# Altium PCB Probe.PcbDoc
Units mil, origin at the board's own origin, x right, y up, seen from the top; angles counter-clockwise.
Board outline 535.43 x 1175.2 mil, 2 copper layers (Top Layer, Bottom Layer); 4 components, 4 nets, 10 pads, 1 vias.
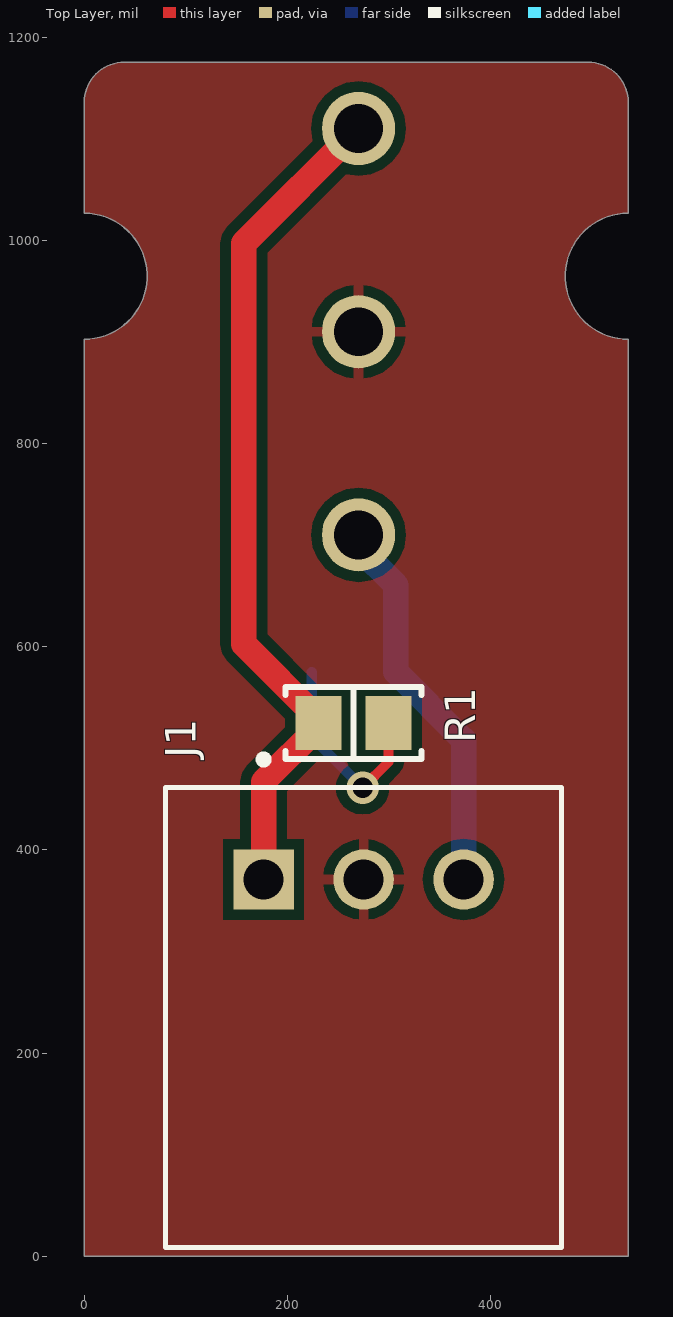
[diagram p0: Top Layer view]
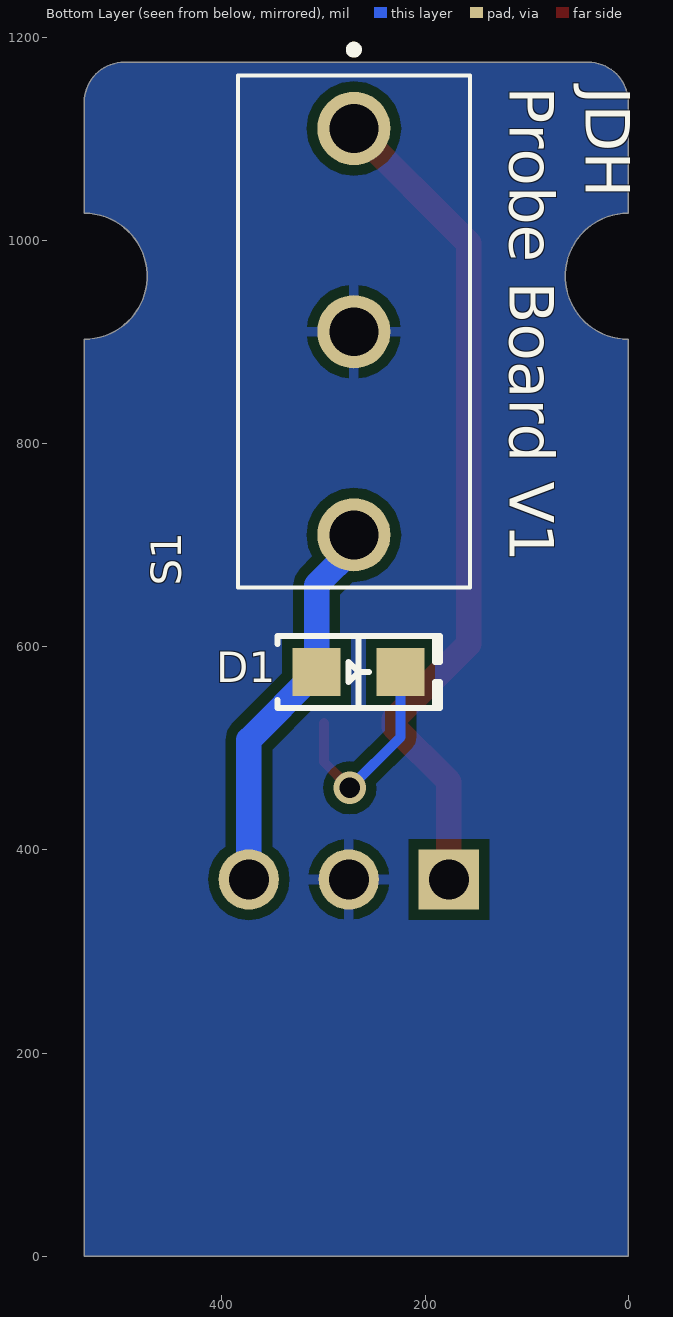
[diagram p1: Bottom Layer view, seen from below]

## Layer stack, top to bottom
Top Solder: solder mask 0.4, Solder Resist, Dk 3.5
Top Layer: signal copper 1.4
Dielectric 1: dielectric 12.6, FR-4, Dk 4.8
Bottom Layer: signal copper 1.4
Bottom Solder: solder mask 0.4, Solder Resist, Dk 3.5

## Board outline
0,0 0,902.56 ccw(c0,964.57) 0,1026.57 0,1135.83 cw(c39.37,1135.83) 39.37,1175.2 496.06,1175.2 cw(c496.06,1135.83) 535.43,1135.83 535.43,1026.57 ccw(c535.43,964.57) 535.43,902.56 535.43,0

## Design rules (kind name [scope] priority, off if disabled: settings)
Clearance [All] p1: gap=10 ignorepadtopadclearanceinfootprint=FALSE except(0: Arc-Hole Track-Hole SMDPad-Hole THPad-Hole Via-Hole Fill-Hole Poly-Hole Region-Hole Text-Hole)
PolygonConnect [All] p1: connectstyle=Relief reliefconductorwidth=10 reliefentries=4 polygonreliefangle="90 Angle" airgapwidth=10
RoomDefinition Probe [InComponentClass('Probe')] p1: confinementstyle=ConfineIn formatcopy=TRUE lockcomponents=FALSE outline 59,-13 491,-13 491,1241 59,1241
RoutingVias [All] p1: holewidth=28 width=50 viastyle="Through Hole" minholewidth=28 minwidth=50 maxholewidth=28 maxwidth=50
SolderMaskExpansion [All] p1: expansion=4 istentingtop=TRUE
Width [All] p1: maxlimit=100 minlimit=10 preferedwidth=10
30 further rules are at their usual default settings.

## Components (designator, comment, footprint, x,y, rotation, side; value= is the part's Value field where it differs from the comment)
D1 "Blue" "LED 0805_2012 BLUE" 265.34,575 r180 bottom
J1 "S3B-XH-A(LF)(SN)" JST_S3B-XH-A(LF)(SN) 275,235 r180 top
R1 "1 kOhms" "RES 0805_2012" 265,525 r0 top
S1 "ZMA00A080P00PC" ZMA00A080P00PC 270,1110 r270 bottom

## Footprints (in the part's own frame and the unit in brackets; to place one, negate y for a bottom-side part, rotate by r counter-clockwise, add the part's x,y. Pads: shape width x height; smd on the part's side, far side on the other; paste and mask are expansions set on the pad)
JST_S3B-XH-A(LF)(SN) [mm]
  rect 1.508x1.508 hole 1: 1(2.5,-3.45)
  round 1.508 hole 1: 2(0,-3.45) 3(-2.5,-3.45)
  silkscreen extent -4.95,-6.55 4.95,5.75, body extent -4.95,-5.75 4.95,5.75, height 6.15
"LED 0805_2012 BLUE" [mm] "Chip Diode, 2-Leads, Body 2.00x1.25mm, IPC Medium Density"
  rect 1.2x1.2 smd: 1(-1.05,0) 2(1.05,0)
  silkscreen extent -2.03,-0.9 2.03,0.9, body extent -1,-0.63 1,0.63, height 0.9
"RES 0805_2012" [mm] "Chip Resistor, 2-Leads, Body 2.00x1.25mm, IPC Medium Density"
  rect 1.15x1.35 smd: 1(-0.875,0) 2(0.875,0)
  silkscreen extent -1.7,-0.9 1.7,0.9, body extent -1,-0.62 1,0.63, height 0.6
ZMA00A080P00PC [mm]
  round 1.83 hole 1.22: 1(0,0) 2(5.08,0) 3(10.16,0)
  silkscreen extent -2.02,-2.9 11.48,2.9, body extent -1.32,-2.9 11.48,2.9, height 7.45

## Part data
D1: library part 5990191007F, "LED BLUE 0805 SMD", Current - Test=20mA, Device Package="0805 (2012 Metric)", Lens Color=0.80mm, Manufacturer=Dialight, Millicandela Rating=105mcd, Supplier Device Package=0805, Supplier Part Number 1=350-4359-1-ND, Voltage - Forward (Vf) (Typ)=3.2V, Color=Blue, ComponentLink1Description=Datasheet, ComponentLink1URL=http://www.dialightsignalsandcomponents.com/Assets/Brochures_And_Catalogs/Indication/CBI_SMD_new/Dialight_CBI_data_599-0805_Apr2018.pdf, ComponentLink2Description="DigiKey Link", ComponentLink2URL=https://www.digikey.com/en/products/detail/dialight/5990191007F/9385414, Configuration=Standard, Height (Max)=0.80mm, LastUpdated="4/12/2022 10:51:43 PM", Lens Size="1.40mm x 1.25mm", Lens Style="Rectangle with Flat Top", Lifecycle Status=Active, Minimum Order=1, Mounting Type="Surface Mount", Package / Case="0805 (2012 Metric)", Packaging=TapeAndReel, Part Number=5990191007F, Part Status=Active, PartId=759, Price=0.09, Series=599, Size / Dimension="2.00mm L x 1.25mm W", Supplier 1=DigiKey, Viewing Angle=140°, Wavelength - Dominant=470nm
J1: "Connector Header Through Hole, Right Angle 3 position 0.098\" (2.50mm)", Package=None, Availability=Unavailable, MF="{'manufacturer': u'JST Sales America Inc.'}", MP=S3B-XH-A(LF)(SN), Price=None
R1: library part RNCP0805FTD1K00, "RES 1K OHM 1% 1/4W 0805", Device Package="0805 (2012 Metric)", Manufacturer="Stackpole Electronics Inc", Operating Temperature="-55°C ~ 155°C", Power (Watts)="0.25W, 1/4W", Supplier Device Package=0805, Supplier Part Number 1=RNCP0805FTD1K00CT-ND, Temperature Coefficient=±100ppm/°C, Tolerance=±1%, ComponentLink1Description=Datasheet, ComponentLink1URL=https://www.seielect.com/catalog/sei-rncp.pdf, ComponentLink2Description="DigiKey Link", ComponentLink2URL=https://www.digikey.com/en/products/detail/stackpole-electronics-inc/RNCP0805FTD1K00/2240229, Composition="Thin Film", Features=Anti-Sulfur, Height - Seated (Max)="0.025\" (0.65mm)", LastUpdated="4/12/2022 10:40:40 PM", Lifecycle Status=Active, Minimum Order=1, Number of Terminations=2, Package / Case="0805 (2012 Metric)", Packaging=TapeAndReel, Part Number=RNCP0805FTD1K00, Part Status=Active, PartId=28023, Price=0.01, Resistance="1 kOhms", Series=RNCP, Size / Dimension="0.079\" L x 0.049\" W (2.00mm x 1.25mm)", Supplier 1=DigiKey
S1: "Switch", Manufacturer_Name="C & K COMPONENTS", Datasheet Link=https://www.ckswitches.com/media/1372/zmasnap.pdf, Height=7.35mm, Manufacturer_Part_Number=ZMA00A080P00PC

## Via types
v1: diameter 32, hole 20, Top Layer to Bottom Layer, tented both sides, 1 vias

## Nets (pads, with @x,y where several pads share a name; then routed paths per layer and width w, separated by ;. In a path a pad name is that pad's centre, name@x,y a point inside that pad or via, vN(x,y) a via of type N, cw(c..) or ccw(c..) an arc to the next point about the centre after c; other vN are vias at no path point)
GND: J1.2 S1.2
NetD1_2: D1.2 R1.2 | length 209.3
  Top Layer w10: v1(274,461) 299.45,486.45 R1.2
  Bottom Layer w10: D1.2 224,511 v1(274,461)
SIG: J1.1 R1.1 S1.1 | length 838.8
  Top Layer w25: J1.1 176.57,467.09 230.55,521.06 R1.1 230.55,528.94 157,602.49 157,997 S1.1
VCC: D1.1 J1.3 S1.3 | length 382
  Bottom Layer w25: S1.3 270,697.27 306.68,660.59 D1.1 373.43,508.25 J1.3

## Polygon pours and split planes (outlines as drawn)
GND on Top Layer "Top Ground Pour" (solid, pour order 0): 0,0 0,902.56 ccw(c0,964.57) 0,1026.57 0,1135.83 cw(c39.37,1135.83) 39.37,1175.2 496.06,1175.2 cw(c496.06,1135.83) 535.43,1135.83 535.43,1026.57 ccw(c535.43,964.57) 535.43,902.56 535.43,0
GND on Bottom Layer "Bottom Ground Pour" (solid, pour order 1): 0,0 0,902.56 ccw(c0,964.57) 0,1026.57 0,1135.83 cw(c39.37,1135.83) 39.37,1175.2 496.06,1175.2 cw(c496.06,1135.83) 535.43,1135.83 535.43,1026.57 ccw(c535.43,964.57) 535.43,902.56 535.43,0

## Silkscreen, mask and mechanical layers (free items; w line width, h text height)
Bottom Overlay:
  text "JDH / Probe Board V1" at 131,1151 h75 r90
DXF:
  lines w0.5: 62.01,964.57 473.43,964.57 ; 0,0 0,902.56 ccw(c0,964.57) 0,1026.57 0,1135.83 cw(c39.37,1135.83) 39.37,1175.2 496.06,1175.2 cw(c496.06,1135.83) 535.43,1135.83 535.43,1026.57 ccw(c535.43,964.57) 535.43,902.56 535.43,0 0,0